# Altium PCB CH32X035F7.PcbDoc
Units mil, origin at the board's own origin, x right, y up, seen from the top; angles counter-clockwise.
Board outline 1213.03 x 1699.03 mil, 2 copper layers (Top Layer, Bottom Layer); 30 components, 32 nets, 135 pads, 22 vias.
Unrouted connection lines stored in the file: 9.
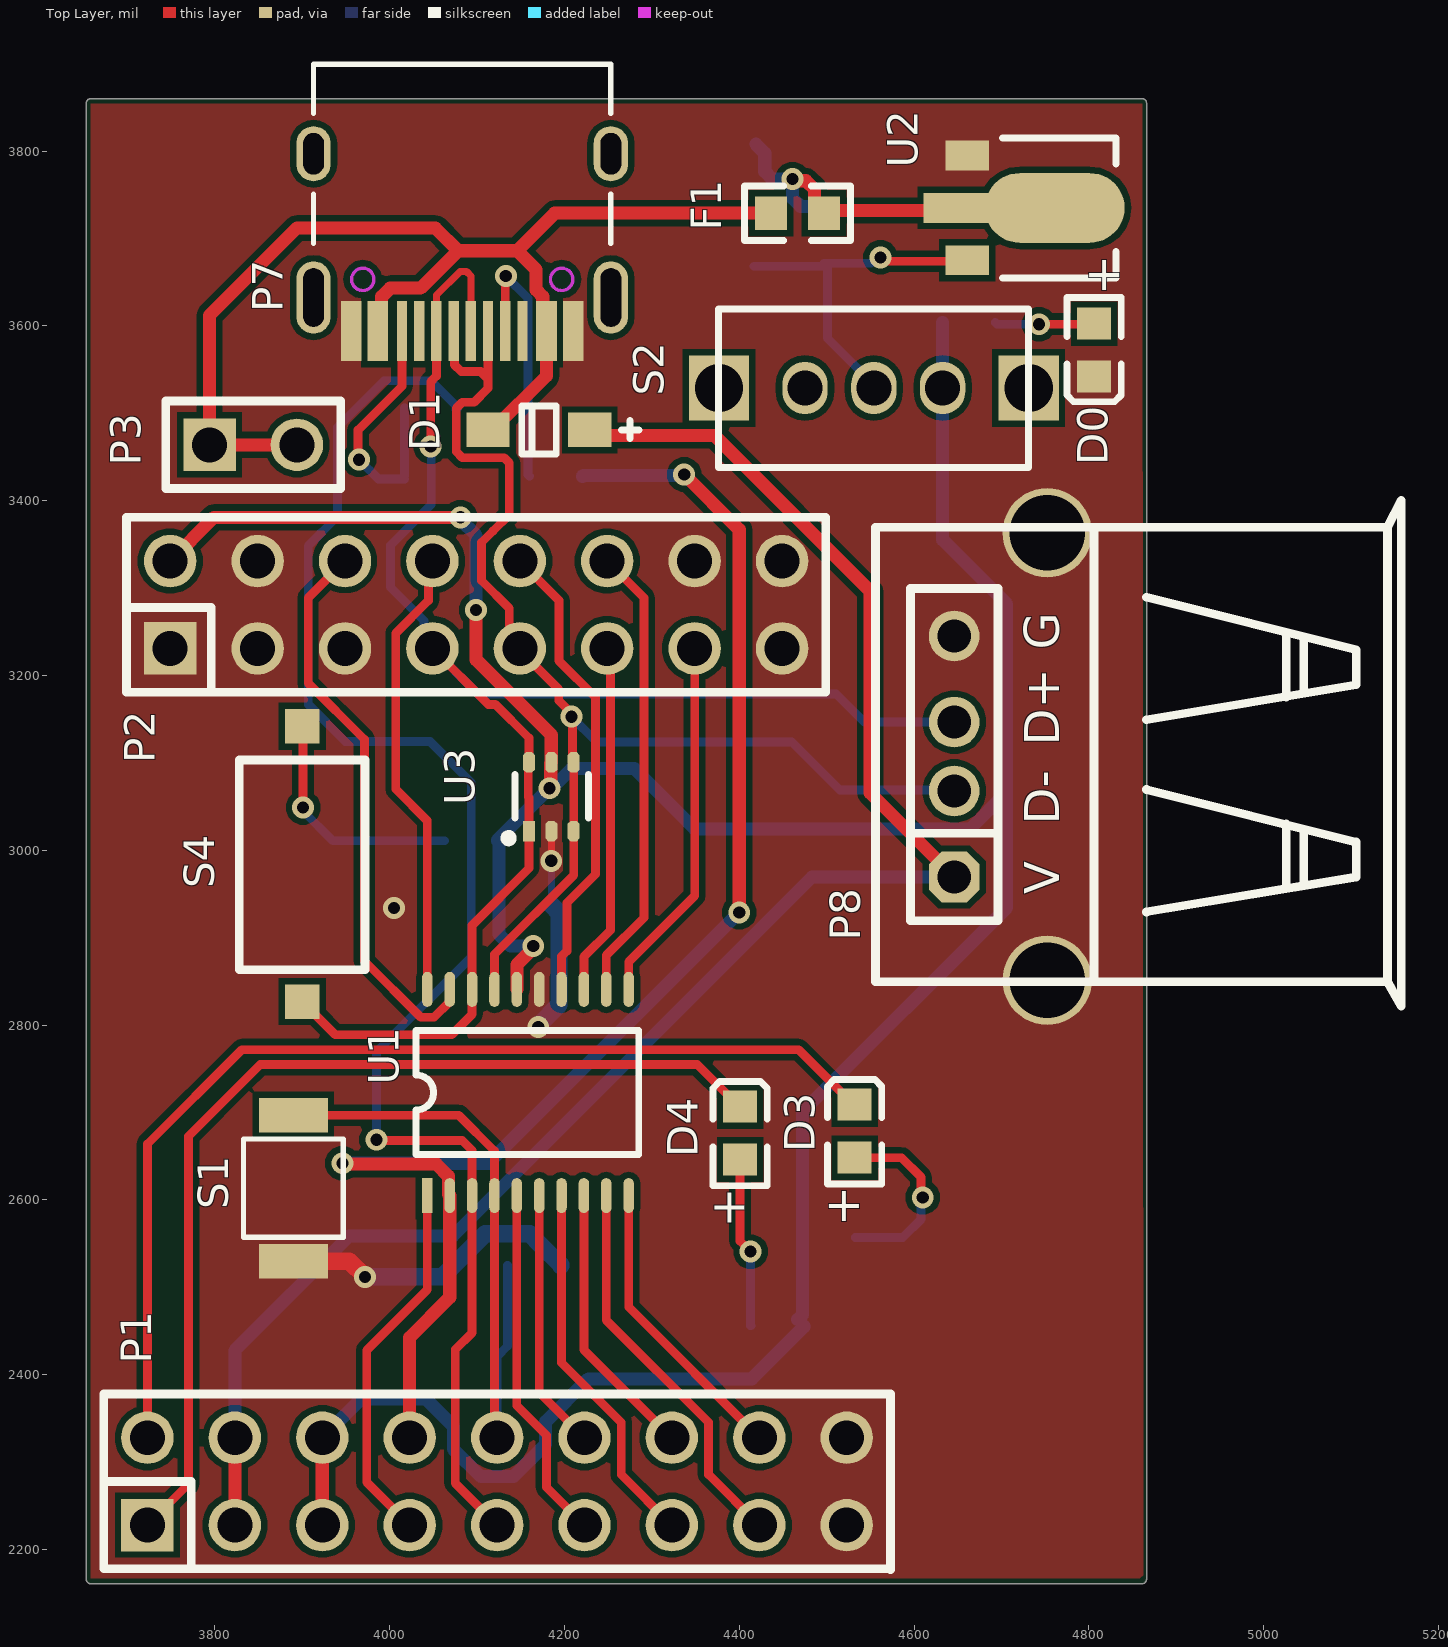
[diagram p0: Top Layer view]
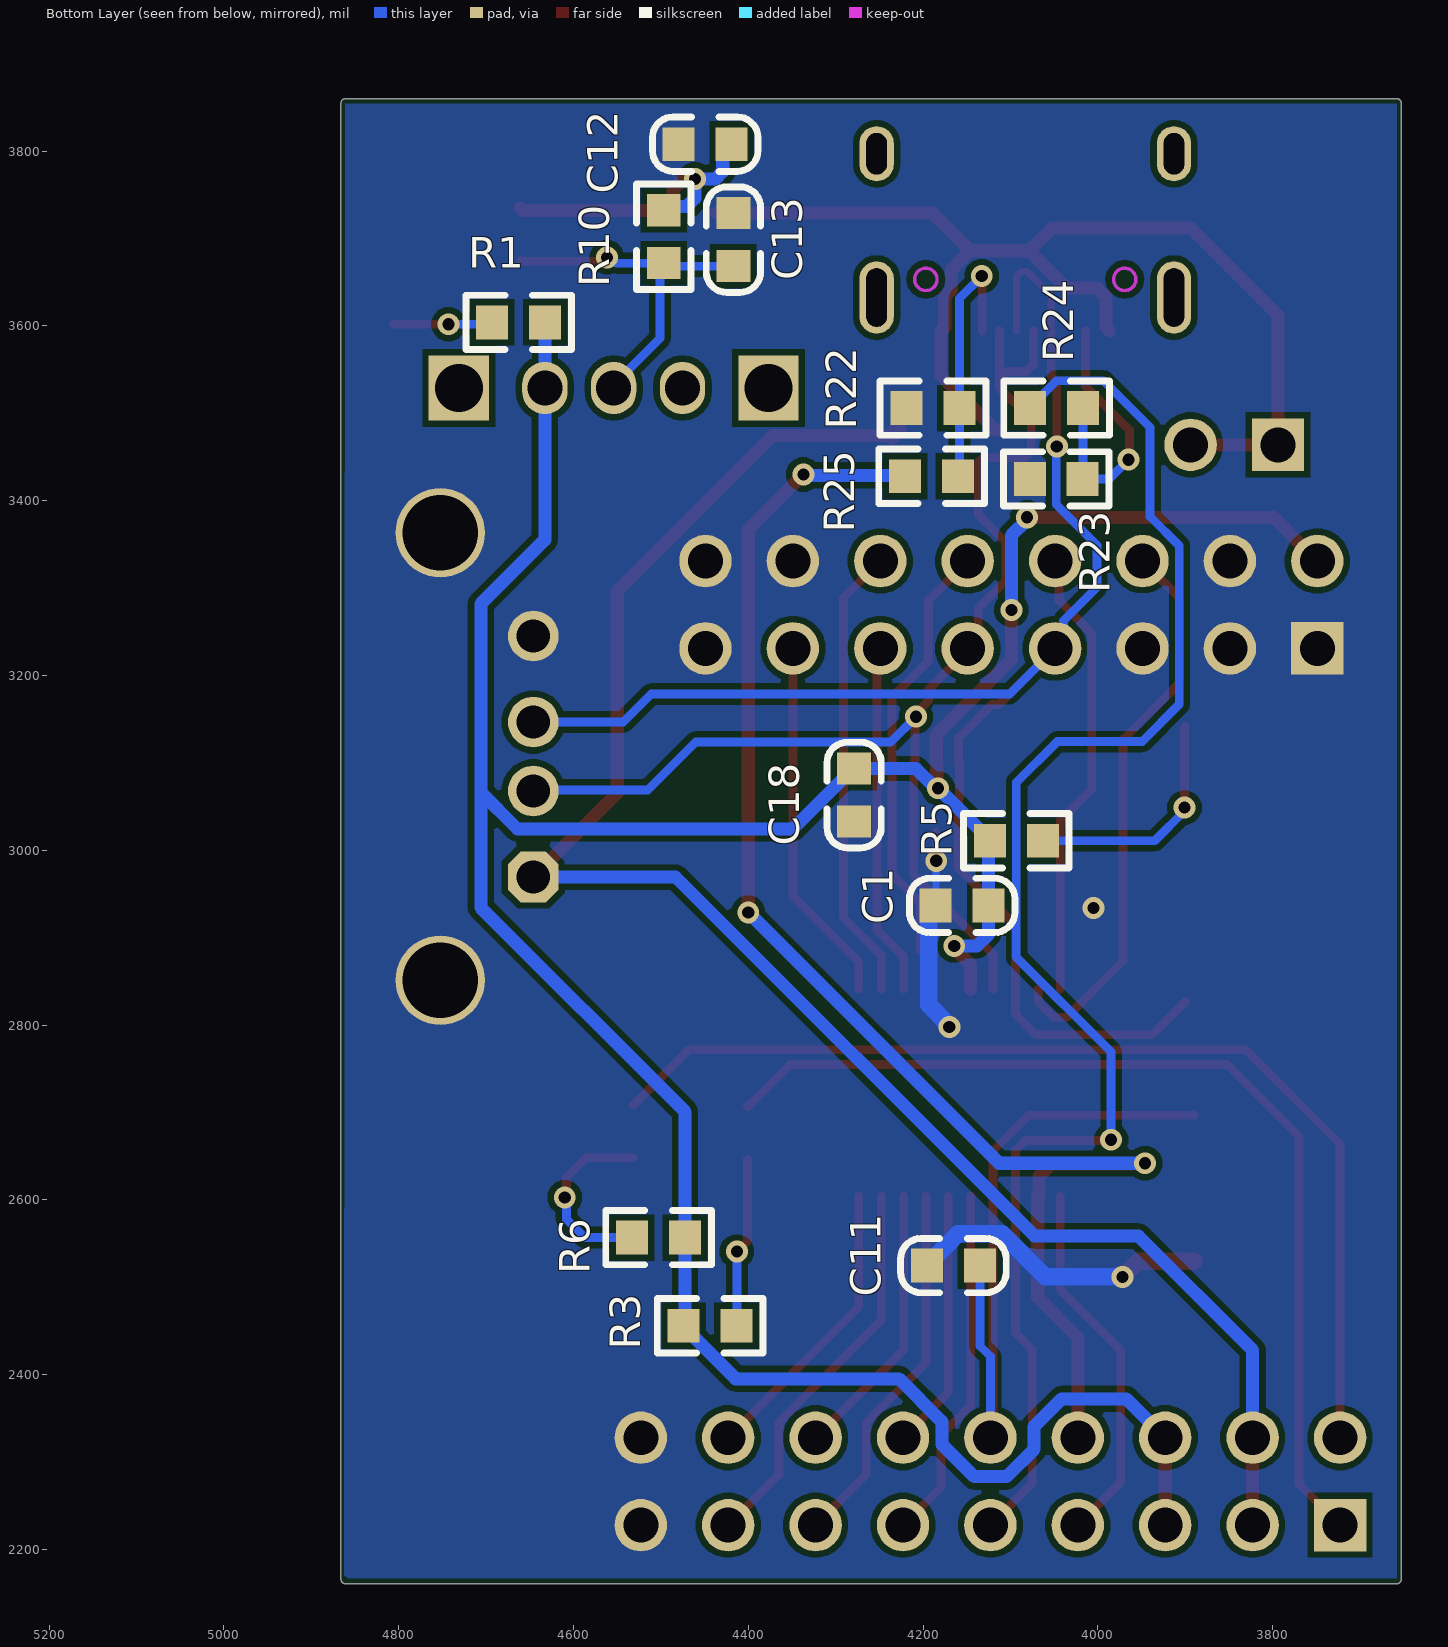
[diagram p1: Bottom Layer view, seen from below]

## Layer stack, top to bottom
Top Solder: solder mask 0.4, Solder Resist, Dk 3.5
Top Layer: signal copper 1.4
Dielectric1: dielectric 12.6, FR-4, Dk 4.8
Bottom Layer: signal copper 1.4
Bottom Solder: solder mask 0.4, Solder Resist, Dk 3.5

## Board outline
3652.99,2166 ccw(c3658,2166) 3658,2160.99 4861,2160.99 ccw(c4861,2166) 4866.02,2166 4866.02,3855 ccw(c4861,3855) 4861,3860.01 3658,3860.01 ccw(c3658,3855) 3652.99,3855

## Design rules (kind name [scope] priority, off if disabled: settings)
Clearance [All] p1: gap=7 ignorepadtopadclearanceinfootprint=TRUE except(0: Arc-Hole Track-Hole SMDPad-Hole THPad-Hole Via-Hole Fill-Hole Poly-Hole Region-Hole Text-Hole)
ComponentClearance [All] p1 off: gap=10 collisioncheckmode=3 verticalgap=10 showdistances=FALSE
DiffPairsRouting [All] p1: maxlimit=10 minlimit=7 mostfreqgap=8 toplayer_minwidth=15 toplayer_maxwidth=15 toplayer_prefwidth=15 bottomlayer_minwidth=15 bottomlayer_maxwidth=15 bottomlayer_prefwidth=15 maxuncoupledlength=500
HoleSize [All] p1: absolutevalues=TRUE maxlimit=200 minlimit=1 maxpercent=80.000 minpercent=20.000
HoleToHoleClearance [All] p1: gap=6 allowstackedmicrovias=TRUE
MinimumSolderMaskSliver [All] p1 off: minsoldermaskwidth=2
PolygonConnect [All] p1: connectstyle=Direct reliefconductorwidth=10 reliefentries=4 polygonreliefangle="90 Angle" airgapwidth=10
RoutingVias [All] p1: holewidth=14 width=25 viastyle="Through Hole" minholewidth=14 minwidth=25 maxholewidth=40 maxwidth=60
SilkToSilkClearance [All] p1 off: silktosilkclearance=0
SilkToSolderMaskClearance [IsPad] p1 off: minsilkscreentomaskgap=0 clearancetoexposedcopper=TRUE
SolderMaskExpansion [All] p1: expansion=4 istentingtop=FALSE
Width [All] p1: maxlimit=100 minlimit=6 preferedwidth=10
23 further rules are at their usual default settings.

## Components (designator, comment, footprint, x,y, rotation, side; value= is the part's Value field where it differs from the comment)
C1 "0.1uF" 0603_C 4185.63,2937 r180 bottom
C11 "0.1uF" 0603_C 4195.63,2525 r180 bottom
C12 "10uF" 0603_C 4419,3808 r0 bottom
C13 "10uF" 0603_C 4417,3668.37 r90 bottom
C18 "0.1uF" 0603_C 4279,3033 r90 bottom
D0 "POWER  red" 0603+ 4806,3602.63 r270 top
D1 "Diode" SOD-123 4229,3481 r180 top
D3 "LED2" 0603+ 4532,2648.37 r90 top
D4 "LED1" 0603+ 4401,2646.37 r90 top
F1 "500mA" 0603 4436.37,3729 r0 top
P1 "Header 9X2" IDC18-2.54mm 3723,2228 r90 top
P2 "Header 8X2" IDC16-2.54mm 3749,3231 r90 top
P3 "HEADER 2" SIP2-2.54mm 3794,3464 r270 top
P7 "TYPE-C" TYPE-C-Receptacle-2.0 4083.08,3594.24 r180 top
P8 "USB_A" USBAF 4646,2969.57 r90 top
R1 "1K" 0603 4693,3604 r180 bottom
R3 "1K" 0603 4472.37,2557 r0 bottom
R5 "1K" 0603 4123.63,3011 r180 bottom
R6 "1K" 0603 4474,2456 r180 bottom
R10 "NC(0Ω)" 0603 4496.65,3671.72 r90 bottom
R22 "5.1K" 0603 4158.37,3506 r0 bottom
R23 "5.1K" 0603 4017.37,3425 r0 bottom
R24 "0Ω" 0603 4077.63,3506 r180 bottom
R25 "0Ω" 0603 4160,3428 r0 bottom
S1 "KEY" 贴片按键 3890,2697 r270 top
S2 "SW" SW1 4554,3529 r0 top
S4 "Download" SMD_6.1x3.65x2.5mm-KEY 3900,3141.96 r270 top
U1 "CH32X035F7P6" TSSOP20 4043.2,2605 r0 top
U2 "HT7533" SOT-89 4661,3795 r270 top
U3 "CH412K" SOT-363 4159.41,3022 r0 top

## Footprints (in the part's own frame and the unit in brackets; to place one, negate y for a bottom-side part, rotate by r counter-clockwise, add the part's x,y. Pads: shape width x height; smd on the part's side, far side on the other; paste and mask are expansions set on the pad)
0603 [mm]
  rect 0.93x0.98 smd: 1(0,0) 2(1.54,0)
  silkscreen extent -0.76,-0.79 2.3,0.79
0603+ [mm]
  rect 0.93x0.98 smd: 1(0,0) 2(1.54,0)
  silkscreen extent -0.76,-0.79 2.27,0.79
0603_C [mm]
  rect 0.93x0.98 smd mask+0.051: 1(0,0) 2(1.54,0)
  silkscreen extent -0.76,-0.79 2.31,0.79
IDC16-2.54mm [mil]
  rect 60x60 hole 40: 1(0,0)
  round 60 hole 40: 2(100,0) 3(0,-100) 4(100,-100) 5(0,-200) 6(100,-200) 7(0,-300) 8(100,-300) 9(0,-400) 10(100,-400) 11(0,-500) 12(100,-500) 13(0,-600) 14(100,-600) 15(0,-700) 16(100,-700)
  silkscreen extent -50,-750 150,50
IDC18-2.54mm [mil]
  rect 60x60 hole 40: 1(0,0)
  round 60 hole 40: 2(100,0) 3(0,-100) 4(100,-100) 5(0,-200) 6(100,-200) 7(0,-300) 8(100,-300) 9(0,-400) 10(100,-400) 11(0,-500) 12(100,-500) 13(0,-600) 14(100,-600) 15(0,-700) 16(100,-700) 17(0,-800) 18(100,-800)
  silkscreen extent -51,-850 150,50
SIP2-2.54mm [mil]
  rect 60x60 hole 40: 1(0,0)
  round 60 hole 40: 2(0,100)
  silkscreen extent -50,-50 50,150
SMD_6.1x3.65x2.5mm-KEY [mm]
  rect 1x1 smd: 1(0,0) 2(8,0)
  silkscreen extent 0.98,-1.83 7.08,1.83
SOD-123 [mm]
  rect 1.25x1 smd: 1(0,0) 2(2.95,0)
  silkscreen extent -1.43,-0.7 1.97,0.7
SOT-89 [mil]
  rect 34x50 smd: 1(0,0) 3(120,0)
  rect 34x100 smd: 2(60,0)
  oval 80x160 smd: ""(60,100)
  silkscreen extent -20,40 140,170
SOT-363 [mm]
  rect 0.35x0.6 smd mask+0.051: 1(0,0)
  oct 0.35x0.6 smd mask+0.051: 2(0.65,0) 3(1.3,0) 4(1.3,2) 5(0.65,2) 6(0,2)
  silkscreen extent -0.7,-0.31 1.73,1.65
SW1 [mm]
  rect 1.75x1.9 hole 1.4: 0(-4.5,0) 0(4.5,0)
  oval 1.321x1.524 hole 1.016: 1(0,0) 2(-2,0) 3(2,0)
  silkscreen extent -4.51,-2.31 4.5,2.29
TSSOP20 [mil]
  rect 12x40 smd: 1(0,0)
  oval 12x40 smd: 2(25.6,0) 3(51.2,0) 4(76.8,0) 5(102.4,0) 6(128,0) 7(153.5,0) 8(179.1,0) 9(204.7,0) 10(230.3,0) 11(230.3,236) 12(204.7,236) 13(179.1,236) 14(153.5,236) 15(128,236) 16(102.4,236) 17(76.8,236) 18(51.2,236) 19(25.6,236) 20(0,236)
  silkscreen extent -13,47 242,189
TYPE-C-Receptacle-2.0 [mm]
  oval 1x2.1 hole 0.6 slot 1.7 at 90 deg: 0(-4.32,-0.97) 0(4.32,-0.97)
  oval 1x1.6 hole 0.6 slot 1.2 at 90 deg: 0(-4.32,-5.15) 0(4.32,-5.15)
  rect 0.6x1.75 smd mask+0.051: A1(-3.225,0) A4(-2.45,0) B1(3.225,0) B4(2.45,0)
  rect 0.3x1.75 smd mask+0.051: A5(-1.25,0) A6(-0.25,0) A7(0.25,0) A8(1.25,0) B5(1.75,0) B6(0.75,0) B7(-0.75,0) B8(-1.75,0)
  Keep-Out Layer circle w0.1: c-2.89,-1.5 r0.325
  Keep-Out Layer circle w0.1: c2.89,-1.5 r0.325
  silkscreen extent -4.32,-7.75 4.32,-2.55
USBAF [mm]
  round 2.6 hole 2.2: 0(-3,-2.7) 0(10,-2.7)
  oct 1.473x1.473 hole 0.965: 1(0,0)
  round 1.473 hole 0.965: 2(2.5,0) 3(4.5,0) 4(7,0)
  silkscreen extent -3.75,-12.99 10.95,2.29
贴片按键 [mm]
  rect 1x2 smd: 1(0,0) 2(4.242,0)
  silkscreen extent 0.69,-1.45 3.55,1.45

## Part data
C1 C11 C18: library part Cap, "Capacitor"
  C11: LatestRevisionDate=17-Jul-2002, LatestRevisionNote="Re-released for DXP Platform.", PackageReference=RAD-0.3, Published=8-Jun-2000, Publisher="Altium Limited"
C12 C13: library part CAP, "Capacitor"
D0 D3 D4: library part LED0, "Typical INFRARED GaAs LED", LatestRevisionDate=08-Jul-2005, LatestRevisionNote="Mech Layer 1 removed.", PackageReference=LED-0, Published=8-Jun-2000, Publisher="Altium Limited"
D1: "Default Diode", Code_JEDEC=DO-214-AB, LatestRevisionDate=17-Jul-2002, LatestRevisionNote="Re-released for DXP Platform.", PackageReference=SMC, PackageVersion=Sep-1996, Published=8-Jun-2000, Publisher="Altium Limited"
F1: library part FUSE1, "Fuse"
P1: "Header, 9-Pin, Dual row", LatestRevisionDate=17-Jul-2002, LatestRevisionNote="Re-released for DXP Platform.", Publisher="Altium Limited"
P2: "Header, 8-Pin, Dual row", LatestRevisionDate=17-Jul-2002, LatestRevisionNote="Re-released for DXP Platform.", Publisher="Altium Limited"
P3: "Header, 2-Pin"
P7: library part TYPE-C1
P8: library part USB, "USB Port"
R1 R3 R6: library part "Res Semi", "Semiconductor Resistor"
R5 R10 R22 R23 R24 R25: library part Res2, "Resistor"
S4: library part KEY1
U1: "RISC-V MCU with USB/PD/ADC/SPI/I2C/UART/OA/CMP"
U2: library part 1117-3.3V
U3: "Qaud ESD protect, high speed"

## Via types
v1: diameter 25, hole 14, Top Layer to Bottom Layer, 22 vias

## Nets (pads, with @x,y where several pads share a name; then routed paths per layer and width w, separated by ;. In a path a pad name is that pad's centre, name@x,y a point inside that pad or via, vN(x,y) a via of type N, cw(c..) or ccw(c..) an arc to the next point about the centre after c; other vN are vias at no path point)
5V: C12.1 F1.2 R10.2 U2. U2.2 | length 368.5
  Top Layer w15: v1(4461,3768) 4462.91,3766.09 4476.23,3766.09 4486.19,3756.12 4486.19,3739.81 F1.2 4500,3732 4658,3732 U2.2
  Bottom Layer w15: C12.1 4429.21,3797.79 4429.21,3776.79 4437.99,3768 v1(4461,3768) 4461,3746 4470.29,3736.71 4492.29,3736.71 R10.2@4501,3728
CC1: P1.8 R25.2 U1.2 | length 1663.5
  Top Layer w15: v1(3946,2642) 3947,2641 4053.71,2641 4067.3,2627.41 4067.3,2606.5 U1.2 4068.8,2488.51 4023,2442.71 P1.8 ; v1(4337,3430) 4400,3367 v1(4400,2929)
  Bottom Layer w15: v1(3946,2642) 4113,2642 v1(4400,2929) ; R25.2 4221.63,3429 4336,3429 v1(4337,3430)
CC2: P1.9 R24.1 U1.3 | length 1754.8
  Top Layer w10: v1(3985,2669) 3986,2668 4083,2668 4094.4,2656.6 U1.3 4094.4,2448.28 4075,2428.88 4075,2276 P1.9
  Bottom Layer w10: v1(3985,2669) 3985,2769.55 4093.31,2877.86 4093.31,3077.69 4046.57,3124.43 3949.57,3124.43 3907,3167 3907,3348.4 3940.5,3381.9 3940.5,3484.07 3993.72,3537.29 4047.32,3537.29 4076,3508.62 4076,3504.37 R24.1
GND: C1.1 C11.1 C12.2 C13.2 C18.1 D0.2 P1.17 P1.18 P2.1 P2.3 P2.4 P2.5 P2.14 P2.15 P2.16 P7.A1 P7.B1 P8.0 P8.4 R22.2 R23.2 S1.2 U1.15 U2.1 U3.2 | length 586.7
  Top Layer w8: v1(4185,2988) U3.2
  Top Layer w20: S1.2 3954,2530 v1(3972,2512)
  Bottom Layer w8: v1(4185,2988) 4185,2937.63 C1.1
  Bottom Layer w20: v1(3972,2512) 4060.36,2512 4109.65,2561.29 4160.35,2561.29 4173.18,2548.46 4195.63,2525.98 C11.1 ; v1(4170,2798) 4170,2799.35 4193.82,2823.18 4193.82,2928.81 C1.1
  other v1: 4005,2934
LED1: D4.2 P1.1 | length 1149.2
  Top Layer w10: P1.1 3770,2275 3770,2673 3852,2755 4352.02,2755 4400.02,2707 D4.2@4400.93,2707
LED2: D3.2 P1.2 | length 1215.8
  Top Layer w10: P1.2 3723,2664 3831,2772 4468.02,2772 4531.02,2709 D3.2
NetC13_1: C13.1 R10.1 S2.1 U2.3 | length 407.9
  Top Layer w10: v1@4566,3674 4660,3674 U2.3
  Bottom Layer w10: C13.1 4500,3668.37 4501,3667.37 4501,3586 4554,3533 S2.1 ; R10.1 4501,3671.72 4550.96,3671.72 4557.59,3678.35 v1(4561.65,3678.35)
NetD0_1: D0.1 R1.1 | length 114.1
  Top Layer w10: v1(4743,3602) 4805.37,3602 D0.1
  Bottom Layer w10: R1.1 4695,3602 v1(4743,3602)
NetD3_1: D3.1 R3.2 | length 218.6
  Top Layer w10: D3.1 4585.63,2648.37 4608.09,2625.91 v1@4608.09,2604.91
  Top Layer w15: v1@4608.09,2604.91 v1(4610,2603)
  Bottom Layer w10: R3.2 4587,2557 4608.09,2578.09 v1@4608.09,2601.09
  Bottom Layer w15: v1@4608.09,2601.09 v1(4610,2603)
NetD4_1: D4.1 R6.2 | length 195.5
  Top Layer w10: D4.1 4401,2553 v1(4413,2541)
  Bottom Layer w10: v1(4413,2541) 4413,2456.37 R6.2
NetP7_A5: P7.A5 R22.1 R25.1 | length 303.2
  Top Layer w10: P7.A5 4132.29,3656.29 v1(4133,3657)
  Bottom Layer w10: v1(4133,3657) 4158.37,3631.63 R22.1 4158.37,3429.63 R25.1
NetP7_B5: P7.B5 R23.1 R24.2 | length 304.8
  Top Layer w10: v1@3964,3450 3964,3481 4014.18,3531.18 P7.B5
  Bottom Layer w10: v1(3965,3447) 3987,3425 R23.1 ; R23.1@4016.37,3428 4017,3428.63 R24.2
NetR5_2: R5.2 S4.1 | length 273.5
  Top Layer w10: S4.1 3901,3140.96 v1(3901,3049)
  Bottom Layer w10: v1(3901,3049) 3901,3045 3935,3011 R5.2
PA0: P1.12 U1.6 | length 298.5
  Top Layer w10: U1.6 4171.2,2379.8 P1.12
PA1: P1.13 U1.7 | length 429.3
  Top Layer w10: U1.7 4196.7,2413.7 4265,2345.4 4265,2286 P1.13
PA2: P1.14 U1.8 | length 318.7
  Top Layer w10: U1.8 4222.3,2428.7 P1.14
PA3: P1.15 U1.9 | length 449.5
  Top Layer w10: U1.9 4247.9,2462.5 4365,2345.4 4365,2286 P1.15
PA4: P1.16 U1.10 | length 338.9
  Top Layer w10: U1.10 4273.5,2477.5 P1.16
PA5: P2.13 U1.11 | length 421.3
  Top Layer w10: U1.11 4273.5,2872.5 4349,2948 P2.13
PA6: P2.12 U1.12 | length 525.2
  Top Layer w10: U1.12 4247.9,2879.9 4291,2923 4291,3289 P2.12
PA7: P2.11 U1.13 | length 404.1
  Top Layer w10: U1.13 4222.3,2878.34 4252.65,2908.69 4252.65,3227.35 P2.11
PB1: P2.10 U1.14 | length 542
  Top Layer w10: P2.10 4193.71,3286.29 4193.71,3216.93 4235.65,3175 4235.65,2972.61 4203,2939.96 4203,2885 4196.7,2878.7 U1.14
PB12: P1.7 U1.1 | length 426
  Top Layer w10: P1.7 3974,2277 3974,2428 4043.2,2497.2 U1.1
PC1: P1.11 U1.5 | length 409.1
  Top Layer w10: U1.5 4145.6,2364.8 4179.52,2330.88 4179.52,2271.48 P1.11
PC3: C11.2 P1.10 S1.1 U1.4 | length 778.2
  Top Layer w8: P1.10@4120,2331 P1.10
  Top Layer w10: S1.1 4079,2697 4120,2656 U1.4 P1.10@4120,2331
  Bottom Layer w10: P1.10 4123,2421 4135,2433 C11.2
PC16: P2.9 P7.A7 P7.B7 P8.2 U1.17 U3.3 U3.4 | length 1481.2
  Top Layer w10: P7.A7 4074.14,3593.34 4074.14,3555.7 4082.05,3547.8 4103.8,3547.8 4103.88,3547.87 4112.61,3539.14 ; P7.B7 4112.61,3539.14 ; U1.17 4120,2881 4210.59,2971.59 U3.3 U3.4 4209.3,3102.04 4209.3,3151.7 v1(4208,3153) 4208,3157.06 4193.5,3171.56 4193.5,3184.46 4149,3228.96 P2.9 4137,3243 4137,3277 4105.24,3308.76 4105.24,3333.65 4105.24,3352.24 4118.38,3365.38 4137,3384 4137,3443.46 4131.14,3449.31 4083.28,3449.31 4076.25,3456.34 4076.25,3505.66 4083.28,3512.69 4096.69,3512.69 4112.61,3528.61 4112.61,3539.14
  Bottom Layer w10: v1(4208,3153) 4237.06,3123.94 4460.06,3123.94 4515,3069 4645,3069 P8.2
PC17: P2.7 P7.A6 P7.B6 P8.3 S4.2 U1.18 U3.1 U3.6 | length 1910.6
  Top Layer w8: 4047,3536.23 4047.26,3536.49 ; P7.B6 4053.83,3594.52 4053.83,3635.29 4080.54,3662 4088.23,3662 4092.92,3657.31 P7.A6
  Top Layer w10: S4.2 3938,2789 4071,2789 4094.4,2812.4 U1.18 4094.4,2914.4 4159.41,2979.41 4159.41,3059.94 4158.5,3060.85 4158.5,3099.83 U3.6 4159.41,3128.59 4121,3167 4113,3167 P2.7 ; v1(4047,3462) 4047,3536.23 4053.55,3542.78 P7.B6
  Bottom Layer w10: v1(4047,3462) 4047.68,3461.32 4047.68,3395.62 4001,3348.94 4001,3301 4039.43,3262.57 4039.43,3240.57 P2.7 4101,3179 4511,3179 4543.26,3146.74 P8.3
PC18: P2.6 U1.19 | length 647.2
  Top Layer w10: P2.6 3907,3289 3907,3191.3 3971.37,3126.93 3971.37,2873.37 4035.74,2809 4050.8,2809 4068.15,2826.35 4068.15,2840.35 U1.19
PC19: P2.8 U1.20 | length 522.4
  Top Layer w10: U1.20 4043.2,3034.06 4007,3070.26 4007,3248.4 4044.6,3286 4044.6,3326.6 P2.8
VBUS: D1.1 P1.3 P1.4 P8.1 | length 2011.4
  Top Layer w15: P1.3 P1.4 ; D1.1@4235.4,3474.6 4371.87,3474.6 4549.89,3296.57 4549.89,3065.68 P8.1
  Top Layer w20: D1.1 D1.1@4235.4,3474.6
  Bottom Layer w15: P1.4 3823,2428 3953.79,2558.79 4072.5,2558.79 4483.29,2969.57 P8.1
VBUS1: D1.2 F1.1 P3.1 P3.2 P7.A4 P7.B4 | length 1360
  Top Layer w15: P3.2 P3.1 3794,3612 3894,3712 4052.38,3712 4078.38,3686 ; P7.B4 3990.93,3598.56 3990.93,3633.55 4000.58,3643.19 4035.57,3643.19 4078.38,3686 ; D1.2 4117.78,3481 4179.54,3542.76 P7.A4 4175.22,3598.56 4175.22,3633.55 4167.59,3641.18 4167.59,3664.41 4146,3686 ; F1.1 4189,3729 4146,3686 ; 4078.38,3686 4146,3686
VCC: C1.2 C18.2 P1.5 P1.6 P2.2 R1.2 R3.1 R5.1 R6.1 S2.3 U1.16 U3.5 | length 3659.8
  Top Layer w15: P2.2 3799,3381 v1(4081,3381) ; P1.5 P1.6 ; v1(4099,3275) 4099,3218.07 4185,3132.07 U3.5 4184.39,3100.13 4184.39,3072.39 v1(4183,3071) ; U1.16 4145.6,2869.25 4164.32,2887.97 v1(4164.32,2890.68)
  Bottom Layer w15: P1.6 3967.5,2372.5 4041.43,2372.5 4073,2340.93 4073,2315.07 4104.57,2283.5 4141.43,2283.5 4178.5,2320.57 4178.5,2346.43 4227.39,2395.32 4414.3,2395.32 4474,2455.02 R6.1 ; v1(4081,3381) 4081,3378.29 4099,3360.29 v1(4099,3275) ; C1.2@4125,2936.02 C1.2 4125,2904 4138.32,2890.68 v1(4164.32,2890.68) ; C1.2@4125.31,2937 4125.31,3009.32 R5.1 4123.63,3011.98 4182.65,3071 v1(4183,3071) 4185.71,3071 4208.34,3093.63 C18.2 4279.98,3093.63 4349.11,3024.5 4664.02,3024.5 4706,3066.48 ; R6.1@4466.81,2463.18 4472.37,2468.74 R3.1 4472.37,2700.82 4706,2934.45 4706,3066.48 ; R1.2 4632.56,3603.81 4632.56,3529.19 S2.3 4632.74,3355.26 4706,3282 4706,3066.48
pads on no net: P7.0 P7.A8 P7.B8 S2.0 S2.2

## Polygon pours and split planes (outlines as drawn)
GND on Top Layer "GND_L01_P003" (solid, remove dead copper, pour order 3): 4861,3854 3658,3854 3658,2167 4862,2167
GND on Bottom Layer "GND_L02_P001" (solid, remove dead copper, pour order 1): 4861,3854 3658,3854 3658,2167 4862,2167

## Silkscreen, mask and mechanical layers (free items; w line width, h text height)
Mechanical 1:
  lines w10: 4861,3357 4861,3855 ; 4861,3855 3658,3855 3658,2166 3670,2166 4861,2166 4861,3855

## Text inside footprints (layer, text, board x,y; h text height)
D0: Top Overlay "+" at 4795.01,3640.71 h40
D3: Top Overlay "+" at 4542.99,2610.29 h40 r180
D4: Top Overlay "+" at 4411.99,2608.29 h40 r180
P8: Top Overlay "D-" at 4766,3029.57 h40 r90; Top Overlay "D+" at 4766,3119.57 h40 r90; Top Overlay "V" at 4766,2949.57 h40 r90; Top Overlay "G" at 4766,3229.57 h40 r90